# Altium PCB FlightController_Top_5x5.PcbDoc (part 4 of 4)
Units mm, origin at the board's own origin, x right, y up, seen from the top; angles counter-clockwise.
Board outline 127 x 127 mm, 2 copper layers (Top Layer, Bottom Layer), stack 0.691 mm thick; 156 components, 161 nets, 860 pads, 483 vias.
Unrouted connection lines stored in the file: 9.
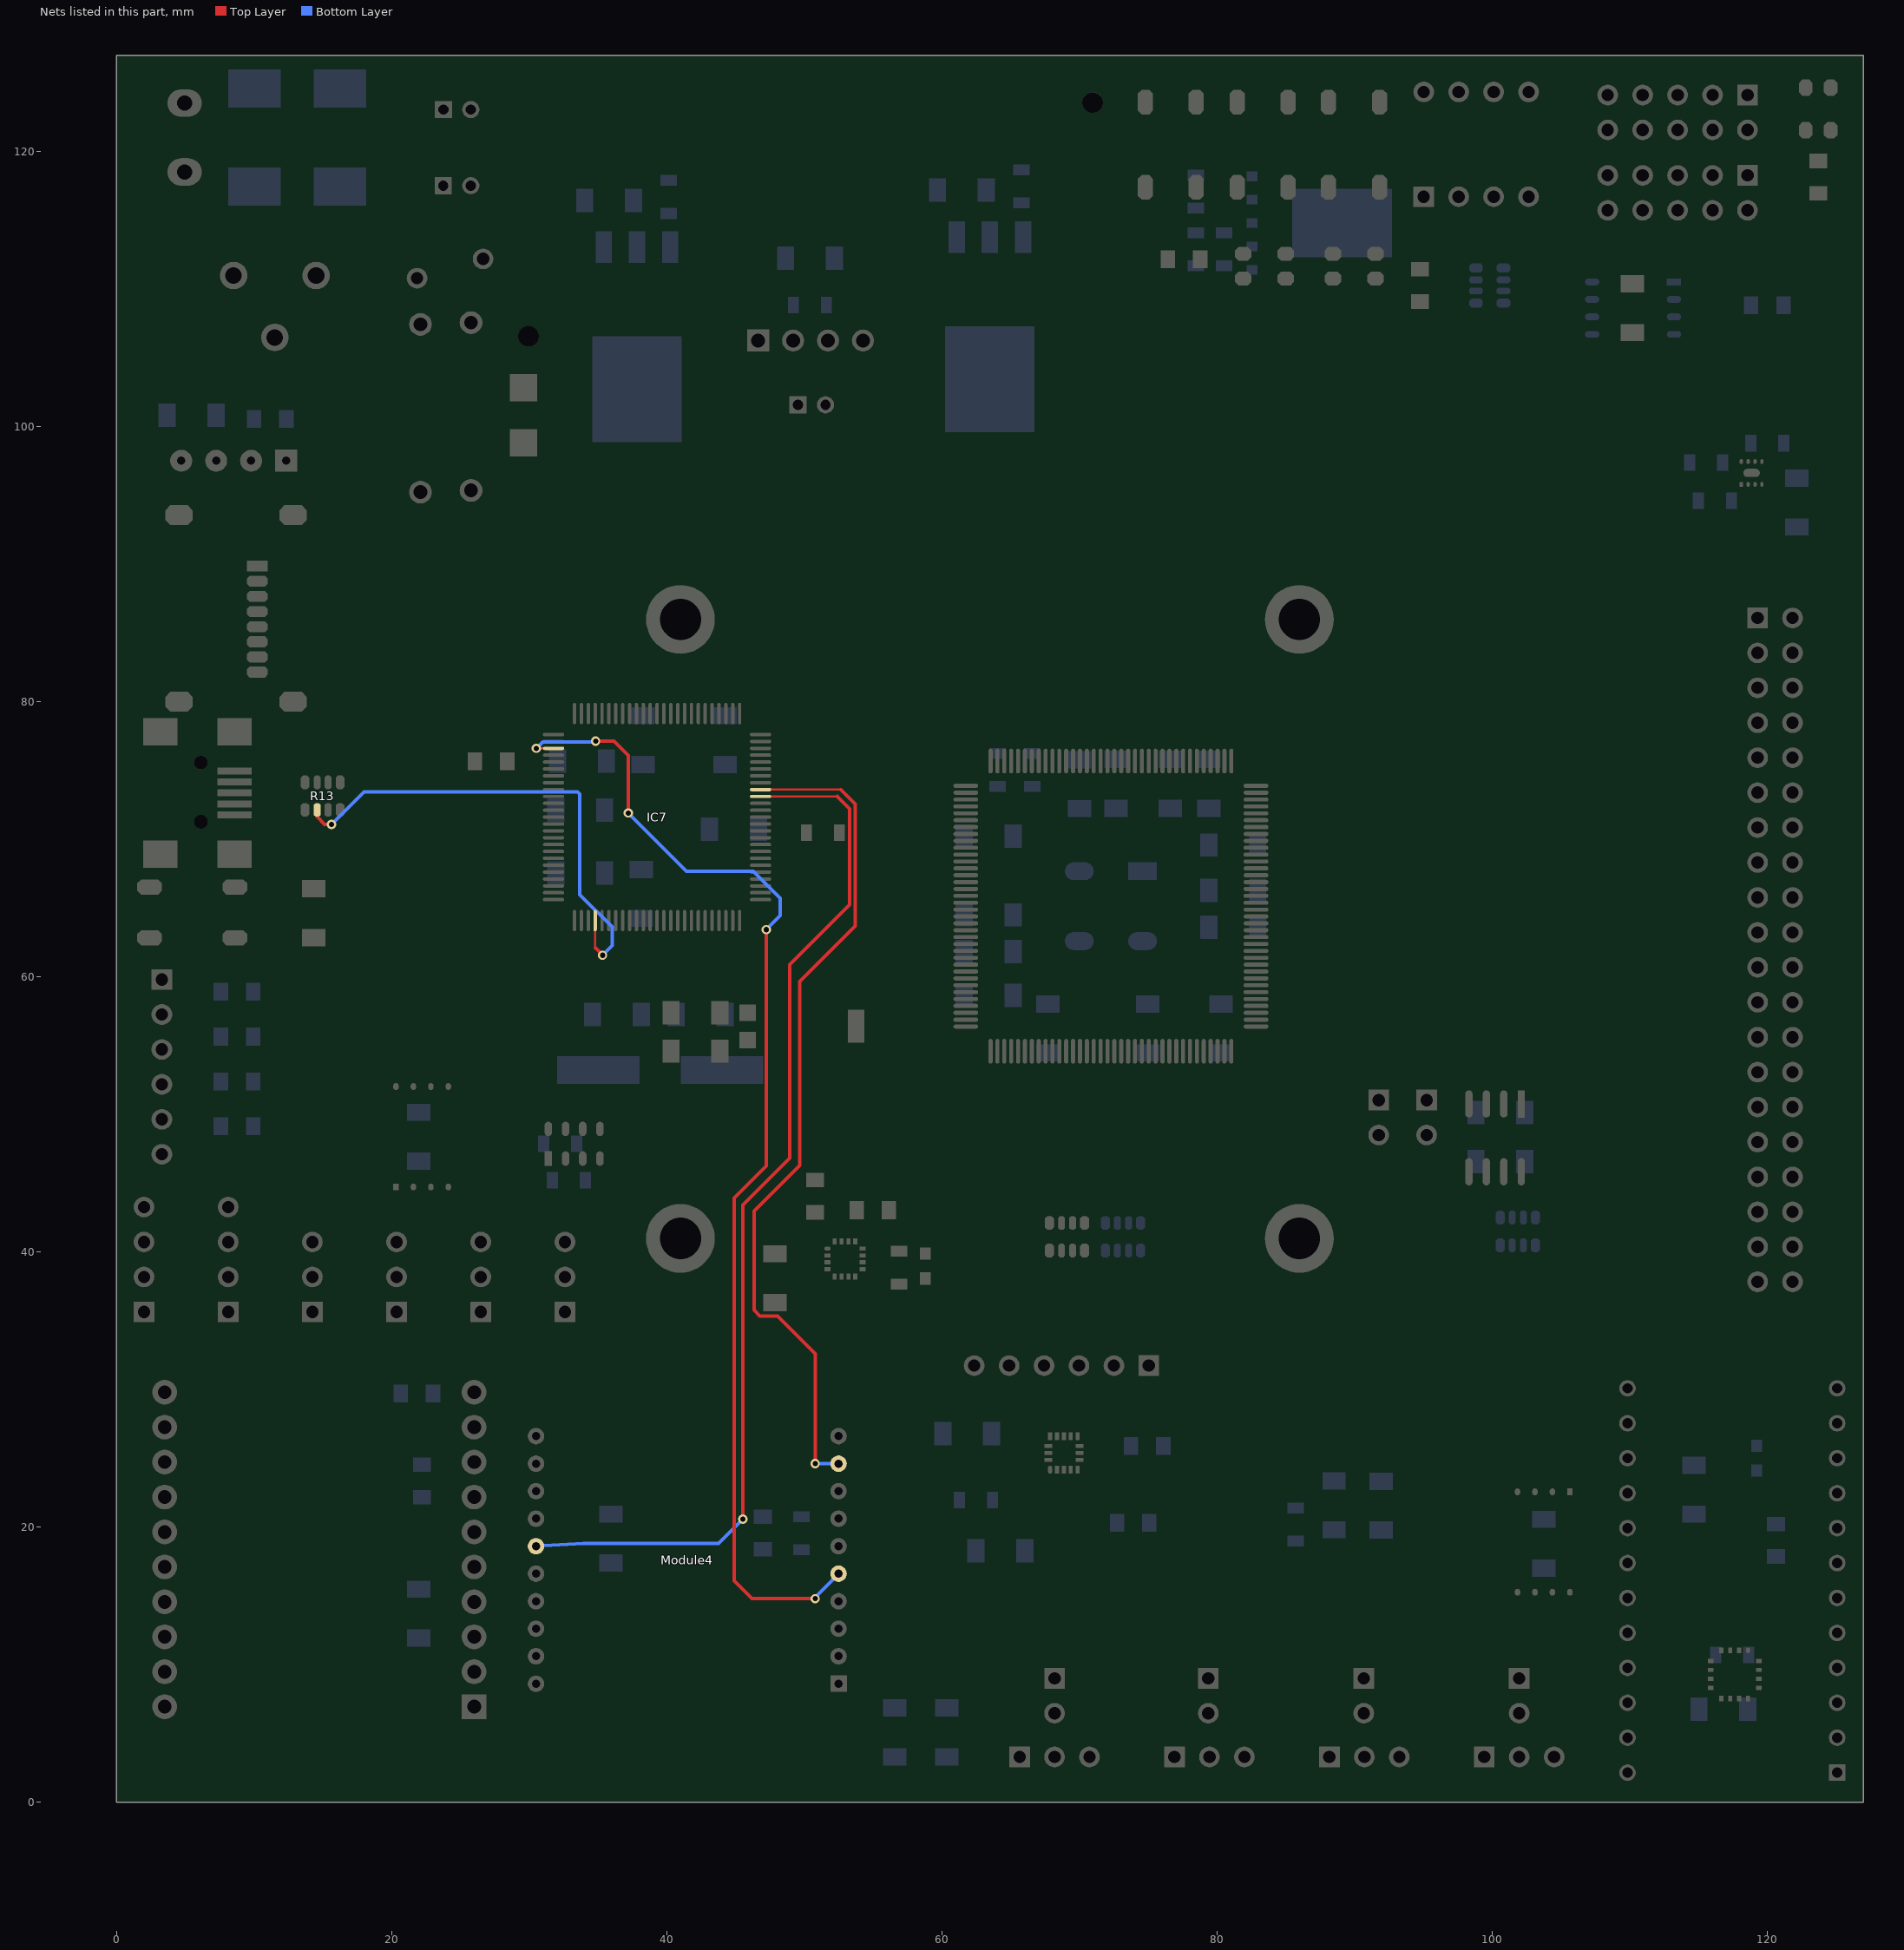
[diagram p4: the nets of this part, all layers, seen from the top]

## Via types
v1: diameter 0.686, hole 0.381, Top Layer to Bottom Layer, 483 vias

## Nets (pads, with @x,y where several pads share a name; then routed paths per layer and width w, separated by ;. In a path a pad name is that pad's centre, name@x,y a point inside that pad or via, vN(x,y) a via of type N, cw(c..) or ccw(c..) an arc to the next point about the centre after c; other vN are vias at no path point) (continued)
VBUS: IC7.54 R13.6 | length 36.6
  Top Layer w0.158: 34.802,62.119 34.802,63.106 34.803,63.107 IC7.54@34.803,64.103
  Top Layer w0.254: R13.6@14.586,72.152 14.586,71.649 15.145,71.09 v1(15.629,71.09) ; 34.802,62.119 v1(35.337,61.584)
  Bottom Layer w0.254: v1(15.629,71.09) 18.001,73.462 33.514,73.462 33.688,73.288 33.688,65.984 36.038,63.634 36.038,62.284 v1(35.337,61.584)
XBEE_/DTR: IC7.92 Module4.9 | length 62.6
  Top Layer w0.158: IC7.92@46.828,73.628 52.674,73.628
  Top Layer w0.254: v1(50.795,24.623) 50.795,32.616 48.059,35.352 46.782,35.352 46.35,35.784 46.35,42.972 49.678,46.3 49.678,59.673 53.713,63.708 53.713,72.589 52.674,73.628
  Bottom Layer w0.254: v1(50.795,24.623) Module4.9@52.499,24.623
XBEE_/RESET: IC7.28 Module4.5 | length 86.4
  Top Layer w0.158: v1(30.526,76.627) IC7.28@31.778,76.628
  Top Layer w0.254: v1(34.833,77.146) 36.179,77.146 37.206,76.119 v1(37.206,71.928) ; v1(47.239,63.445) 47.239,46.262 44.903,43.925 44.903,16.099 46.198,14.804 v1(50.795,14.804)
  Bottom Layer w0.254: v1(30.526,76.627) 30.985,77.086 34.773,77.086 v1(34.833,77.146) ; v1(37.206,71.928) 41.448,67.686 46.3,67.686 48.255,65.731 48.255,64.461 v1(47.239,63.445) ; v1(50.795,14.804) 50.795,14.919 Module4.5@52.499,16.623
XBEE_ASSOCIATE: IC7.91 Module4.15 | length 77.5
  Top Layer w0.158: IC7.91@46.828,73.128 52.417,73.128
  Top Layer w0.254: v1(45.538,20.595) 45.538,43.429 48.941,46.833 48.941,60.906 53.305,65.27 53.305,72.24 52.417,73.128
  Bottom Layer w0.254: Module4.15@30.499,18.623 33.955,18.817 43.76,18.817 v1(45.538,20.595)
pads on no net: "Header 8.6" BB.6 BB.7 BB.8 FPGA1.18 FPGA1.22 FPGA1.76 FPGA1.88 FPGA1.89 FPGA1.90 H1.NC Header1.3 Header1.4 Header1.5 Header1.6 Header1.7 Header1.8 Header1.9 Header1.10 Header1.11 Header1.12 Header1.14 Header1.16 Header1.17 Header1.18 Header1.24 Header7.12 Header7.18 Header7.20 Header7.22 Header7.24 IC2.3 IC6.3 IC6.5 IC6.6 IC6.7 IC6.14 IC7.1 IC7.6 IC7.7 IC7.8 IC7.14 IC7.20 IC7.21 IC7.22 IC7.26 IC7.27 IC7.32 IC7.33 IC7.34 IC7.35 IC7.41 IC7.42 IC7.43 IC7.44 IC7.51 IC7.68 IC7.69 IC7.71 IC7.79 IC7.80 IC7.82 IC7.83 IC7.84 IC7.89 IC7.90 IC7.95 IC7.96 IC7.97 LED3.3 LED3.4 Module1.NC Module2.2 Module2.11 Module2.12 Module2.16 Module2.19 Module2.20 Module3.1 Module3.8 Module3.SHLD Module4.4 Module4.6 Module4.7 Module4.8 Module4.11 Module4.13 Module4.14 Module4.17 Module4.18 Module4.19 Module4.20 Module5.3 Module6.2 Module6.NC R5.4 R5.8 R13.3 R13.4 R13.7 R13.8 REG1.6 X2.NC

## Polygon pours and split planes (outlines as drawn)
no net on Top Layer "PICGrid- GND" (hatched 90Degree grid 1 track 0.254, pour order 2): 33.08,77.851 45.456,77.851 45.456,65.475 45.526,65.405 33.08,65.405
no net on Top Layer "FPGA- GND" (hatched 90Degree grid 1 track 0.254, pour order 11): 81.188,74.041 63.408,74.041 63.408,56.261 81.188,56.261
no net on Top Layer "Test" (solid, pour order 6): 118.041,36.576 118.041,87.376 123.121,87.376 123.121,36.576
no net on Top Layer "Test" (solid, pour order 10): 107.272,125.265 119.718,125.265 119.718,120.439 107.272,120.439
no net on Top Layer "Test" (solid, pour order 12): 107.272,119.423 119.718,119.423 119.718,114.597 107.272,114.597
no net on Bottom Layer "PICGrid- GND" (solid, pour order 7): 33.08,77.851 45.456,77.851 45.456,65.475 33.15,65.475 33.08,65.405

## Keep-outs
Top Layer:
  lines w0.254: 0.889,34.417 0.889,44.196 1.143,44.45 2.794,44.45 3.175,44.069 3.175,34.544 0.889,34.544 ; 2.159,5.969 2.159,30.353 3.048,31.242 4.318,31.242 4.953,30.607 4.953,5.715 2.413,5.715 2.159,5.969 ; 2.159,46.609 2.159,46.99 2.159,60.833 2.286,60.96 4.318,60.96 4.445,60.833 4.445,46.482 3.937,45.974 2.794,45.974 2.159,46.609 ; 3.302,96.266 3.302,98.933 13.716,98.933 13.716,96.266 3.302,96.266 ; 3.302,117.856 3.302,119.888 6.223,119.888 6.604,119.507 6.604,117.729 5.969,117.094 4.064,117.094 3.302,117.856 ; 3.302,122.555 3.302,124.587 3.683,124.968 6.604,124.968 6.731,124.841 6.731,122.174 3.683,122.174 3.302,122.555 ; 6.985,34.544 9.271,34.544 9.271,44.45 7.239,44.45 6.985,44.196 6.985,34.544 ; 7.112,110.236 7.747,109.601 9.144,109.601 10.033,110.49 10.033,111.506 8.89,112.649 7.112,112.649 7.112,110.236 ; 12.954,110.49 12.954,111.887 13.462,112.395 15.113,112.395 16.002,111.506 16.002,110.49 15.113,109.601 13.843,109.601 12.954,110.49 ; 13.081,34.417 15.367,34.417 15.367,41.783 15.24,41.91 13.208,41.91 13.081,41.783 13.081,34.417 ; 19.177,34.544 21.463,34.544 21.463,41.91 19.177,41.91 19.177,34.544 ; 22.733,116.459 22.733,118.364 22.86,118.491 26.543,118.491 26.797,118.237 26.797,116.459 22.733,116.459 ; 22.733,121.92 26.67,121.92 26.797,122.047 26.797,123.698 26.416,124.079 22.733,124.079 22.733,121.92 ; 24.638,5.207 24.638,30.734 25.019,31.115 27.432,31.115 27.432,5.08 24.765,5.08 24.638,5.207 ; 25.4,34.544 27.686,34.544 27.686,41.529 27.305,41.91 25.4,41.91 25.4,34.544 ; 29.337,8.001 29.718,7.62 31.75,7.62 31.75,26.924 31.496,27.178 31.242,27.432 29.337,27.432 29.337,8.001 ; 31.496,34.544 33.782,34.544 33.782,41.91 31.496,41.91 31.496,34.544 ; 45.339,105.283 45.339,107.442 45.593,107.696 55.372,107.696 55.499,107.569 55.499,105.537 54.991,105.029 45.593,105.029 45.339,105.283 ; 48.514,100.711 48.641,100.584 52.578,100.584 52.578,102.108 52.07,102.616 48.768,102.616 48.514,102.362 48.514,100.711 ; 51.435,7.493 51.435,27.686 53.594,27.686 53.594,7.493 51.435,7.493 ; 61.087,30.48 61.087,33.02 76.2,33.02 76.2,30.48 61.087,30.48 ; 64.262,2.159 72.009,2.159 72.009,4.445 64.262,4.445 64.262,2.159 ; 67.056,5.588 67.056,10.16 69.342,10.16 69.342,5.588 69.088,5.334 67.31,5.334 67.056,5.588 ; 75.692,2.159 75.692,4.318 75.819,4.445 83.185,4.445 83.312,4.318 83.312,2.54 82.931,2.159 75.692,2.159 ; 78.232,5.334 80.518,5.334 80.518,10.16 78.232,10.16 78.232,5.334 ; 86.868,2.159 86.868,4.191 87.122,4.445 93.726,4.445 94.742,3.429 94.742,2.159 86.868,2.159 ; 89.535,5.334 91.821,5.334 91.821,10.16 89.535,10.16 89.535,5.334 ; 90.678,47.371 92.964,47.371 92.964,52.197 90.678,52.197 90.678,47.371 ; 93.741,123.233 93.741,124.884 94.376,125.519 103.52,125.519 103.774,125.265 103.774,123.487 103.52,123.233 93.741,123.233 ; 93.868,115.613 93.868,117.518 94.376,118.026 102.885,118.026 103.774,117.137 103.774,116.248 103.012,115.486 93.995,115.486 93.868,115.613 ; 94.107,47.371 96.266,47.371 96.393,47.498 96.393,52.07 96.266,52.197 94.234,52.197 94.107,52.07 94.107,47.371 ; 97.917,2.159 97.917,4.445 105.664,4.445 105.664,2.159 97.917,2.159 ; 100.838,5.334 100.838,10.16 103.124,10.16 103.124,5.334 100.838,5.334 ; 108.585,1.778 109.474,0.889 110.109,0.889 111.125,1.905 111.125,31.115 108.585,31.115 108.585,1.778 ; 124.079,1.016 124.079,1.905 124.079,30.48 124.714,31.115 125.476,31.115 126.111,30.48 126.111,1.27 125.857,1.016 124.079,1.016
Keep-Out Layer:
  the board outline again, w0.3

## Silkscreen, mask and mechanical layers (free items; w line width, h text height)
Top Overlay:
  lines w0.254: 115.57,22.987 116.205,22.352 ; 116.84,22.987 116.205,22.352 ; 120.65,26.797 121.285,27.432 ; 120.65,28.067 121.285,27.432 ; 116.205,22.352 116.205,27.432 121.285,27.432
  text "+Y" at 119.888,29.718 h1.52 r180
  text "+X" at 114.046,26.543 h1.52 r270

## Text inside footprints (layer, text, board x,y; h text height)
BB: Top Overlay "1" at 120.734,124.63 h1.27 r180; Top Overlay "2" at 121.242,122.09 h1.27 r180
C10: Top Overlay "+" at 46.571,100.85 h1.5
C36: Top Overlay "+" at 20.783,116.783 h1.5
C37: Top Overlay "+" at 20.79,122.313 h1.5
Header7: Top Overlay "1" at 118.803,88.646 h1.27 r270; Top Overlay "2" at 121.343,88.773 h1.27 r270
JEPC: Top Overlay "1" at 120.831,118.818 h1.27 r180; Top Overlay "2" at 121.212,116.151 h1.27 r180